# Altium PCB PCB_LSH-100.PcbDoc
Units mil, origin at the board's own origin, x right, y up, seen from the top; angles counter-clockwise.
Board outline 1950 x 3050 mil, 2 copper layers (Top Layer, Bottom Layer), stack 62.8 mil thick; 1 components, 35 nets, 548 pads, 0 vias.
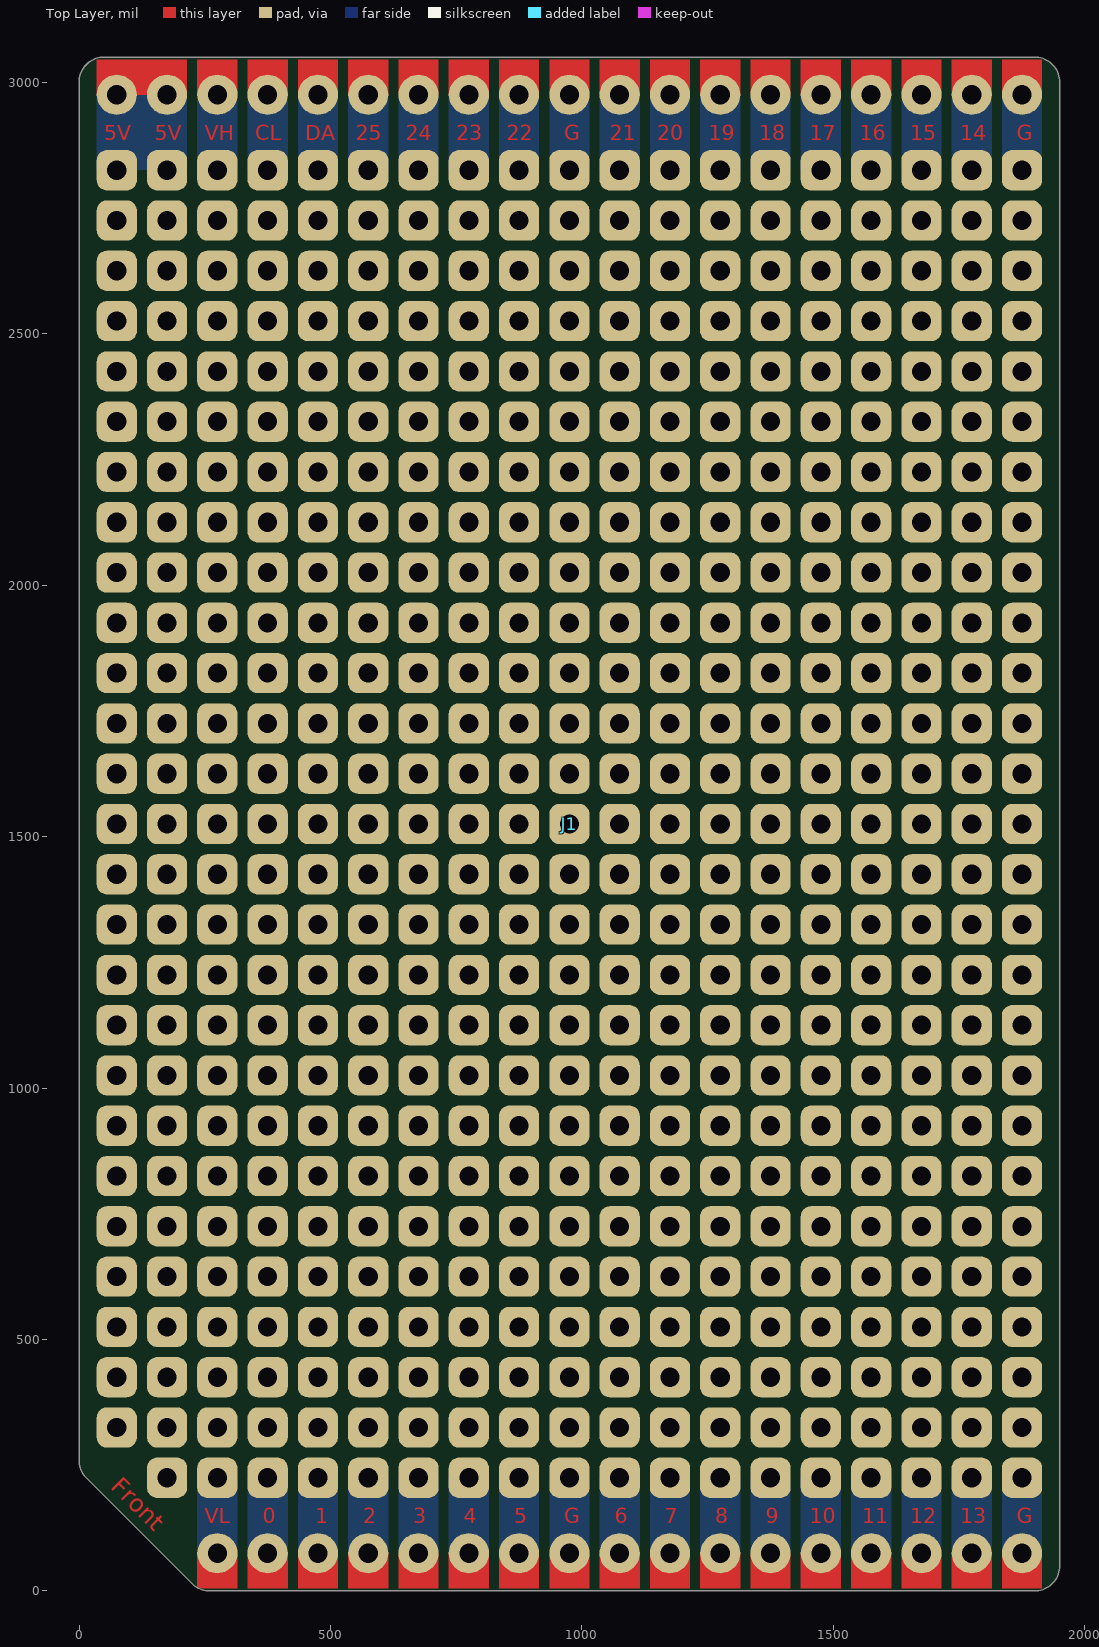
[diagram p0: Top Layer view]
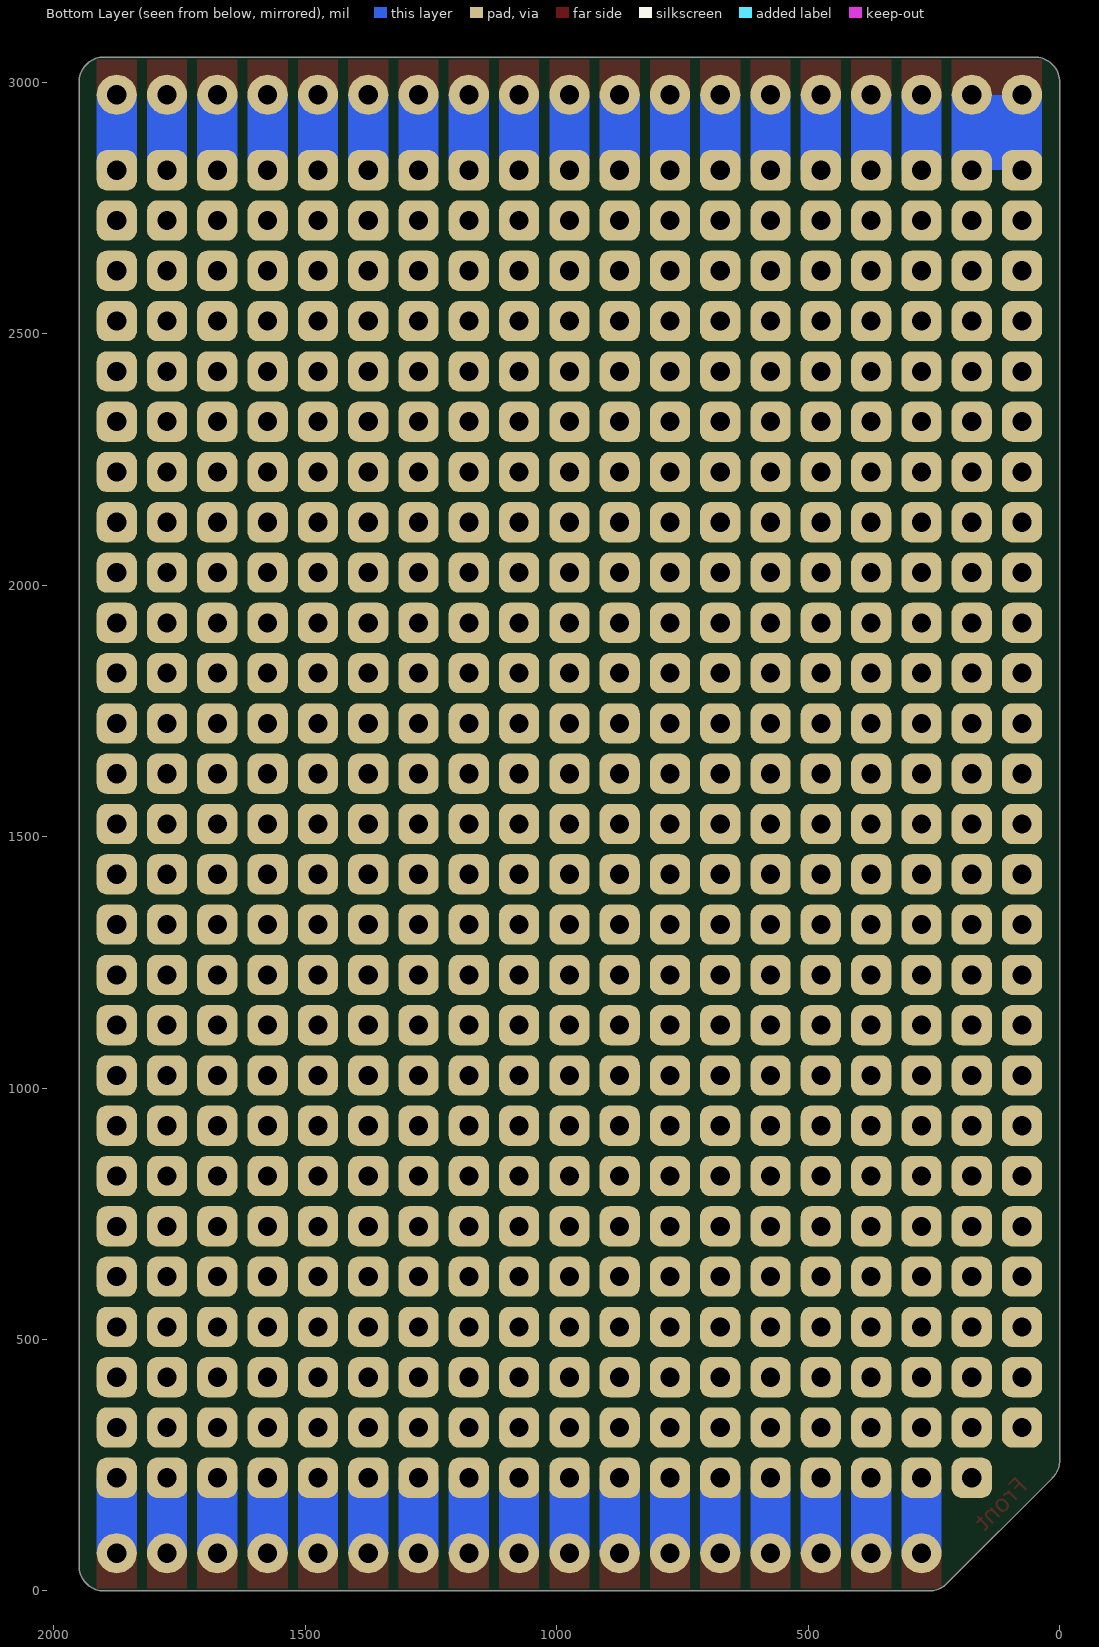
[diagram p1: Bottom Layer view, seen from below]

## Layer stack, top to bottom
Top Layer: signal copper 1.4
Dielectric: core 60, FR-4 S1170, Dk 4.8
Bottom Layer: signal copper 1.4

## Board outline
14.64,224.64 cw(c50,260) 0,260 0,3000 cw(c50,3000) 50,3050 1900,3050 cw(c1900,3000) 1950,3000 1950,50 cw(c1900,50) 1900,0 260,0 cw(c260,50) 224.64,14.64

## Design rules (kind name [scope] priority, off if disabled: settings)
Clearance KeepOut_Type [All vs (OnLayer('Keep-Out Layer'))] p1: gap=4
Clearance All_Type [All] p2: gap=10
ComponentClearance [All] p1 off: gap=10 collisioncheckmode=3 verticalgap=10 showdistances=FALSE
FabricationTestPointUsage TestPointUsage [All] p1: valid=0 allowmultiple=FALSE
FabricationTestpoint Testpoint [(IsPad And (OnTopLayer Or OnBottomLayer))] p1: side=3 testpointundercomponent=TRUE minsize=40 maxsize=100 preferedsize=60 minholesize=20 maxholesize=40 preferedholesize=32 testpointgrid=1 allowsidetop=TRUE allowsidebottom=TRUE usegrid=TRUE gridtolerance=0.01
Height [All] p1 off: minheight=0 maxheight=1000 prefheight=500
HoleSize [All] p1: absolutevalues=TRUE maxlimit=300 minlimit=8 maxpercent=80.000 minpercent=20.000
HoleToHoleClearance [All] p1: gap=12 allowstackedmicrovias=TRUE
MinimumSolderMaskSliver MinimumSolderMaskSliver_Logo [(HasFootprint('LOGO_METEROI_ST_12X3')) vs (HasFootprint('LOGO_METEROI_ST_12X3'))] p1: minsoldermaskwidth=0
MinimumSolderMaskSliver [All] p2: minsoldermaskwidth=5
PasteMaskExpansion [All] p1: expansion=1
PlaneClearance [All] p1: clearance=10
PlaneConnect [All] p1: planeconnectstyle=Direct reliefexpansion=6 reliefentries=4 reliefconductorwidth=6 reliefairgap=6
PolygonConnect PolygonConnect_PAD [All vs (ObjectKind = 'Pad')] p1: connectstyle=Relief reliefconductorwidth=10 reliefentries=4 polygonreliefangle="90 Angle"
PolygonConnect [All] p2: connectstyle=Direct reliefconductorwidth=6 reliefentries=4 polygonreliefangle="90 Angle"
RoomDefinition 01_LSH-100 [InComponentClass('01_LSH-100')] p1: confinementstyle=ConfineIn formatcopy=TRUE lockcomponents=FALSE outline -6150,-3500 -4150,-3500 -4150,-2500 -6150,-2500
RoutingVias [All] p1: holewidth=12 width=20 viastyle="Through Hole" minholewidth=12 minwidth=20 maxholewidth=280 maxwidth=500
SilkToSilkClearance [All] p1: silktosilkclearance=0
SilkscreenOverComponentPads [All] p1: minsilkscreentomaskgap=0
SolderMaskExpansion [All] p1: expansion=2
ViasUnderSMD [All] p1: allowed=TRUE
Width Width_Logo [(HasFootprint('LOGO_METEROI_ST_12X3'))] p1: maxlimit=100 minlimit=0.1 preferedwidth=10
Width [All] p2: maxlimit=200 minlimit=6 preferedwidth=6
16 further rules are at their usual default settings.

## Components (designator, comment, footprint, x,y, rotation, side; value= is the part's Value field where it differs from the comment)
J1 "LOP_SHIELD" LOP_SHIELD_MOD 0,0 r0 top locked

## Footprints (in the part's own frame and the unit in brackets; to place one, negate y for a bottom-side part, rotate by r counter-clockwise, add the part's x,y. Pads: shape width x height; smd on the part's side, far side on the other; paste and mask are expansions set on the pad)
LOP_SHIELD_MOD [mil]
  round 80 hole 38: 1(275,75) 2(375,75) 3(475,75) 4(575,75) 5(675,75) 6(775,75) 7(875,75) 8(975,75) 9(1075,75) 10(1175,75) 11(1275,75) 12(1375,75) 13(1475,75) 14(1575,75) 15(1675,75) 16(1775,75) 17(1875,75) 18(1875,2975) 19(1775,2975) 20(1675,2975) 21(1575,2975) 22(1475,2975) 23(1375,2975) 24(1275,2975) 25(1175,2975) 26(1075,2975) 27(975,2975) 28(875,2975) 29(775,2975) 30(675,2975) 31(575,2975) 32(475,2975) 33(375,2975) 34(275,2975) 35(175,2975) 36(75,2975)
  body extent 25,25 1925,3025, height 39

## Part data
J1: library part LOP_SHIELD_MOD, "Lophilo Shield Module Slot"

## Free pads (board coordinates)
  rrect50% 80x80 hole 38: 0(75,325) 0(75,425) 0(75,525) 0(75,625) 0(75,725) 0(75,825) 0(75,925) 0(75,1025) 0(75,1125) 0(75,1225) 0(75,1325) 0(75,1425) 0(75,1525) 0(75,1625) 0(75,1725) 0(75,1825) 0(75,1925) 0(75,2025) 0(75,2125) 0(75,2225) 0(75,2325) 0(75,2425) 0(75,2525) 0(75,2625) 0(75,2725) 0(75,2825) 0(175,225) 0(175,325) 0(175,425) 0(175,525) 0(175,625) 0(175,725) 0(175,825) 0(175,925) 0(175,1025) 0(175,1125) 0(175,1225) 0(175,1325) 0(175,1425) 0(175,1525) 0(175,1625) 0(175,1725) 0(175,1825) 0(175,1925) 0(175,2025) 0(175,2125) 0(175,2225) 0(175,2325) 0(175,2425) 0(175,2525) 0(175,2625) 0(175,2725) 0(175,2825) 0(275,225) 0(275,325) 0(275,425) 0(275,525) 0(275,625) 0(275,725) 0(275,825) 0(275,925) 0(275,1025) 0(275,1125) 0(275,1225) 0(275,1325) 0(275,1425) 0(275,1525) 0(275,1625) 0(275,1725) 0(275,1825) 0(275,1925) 0(275,2025) 0(275,2125) 0(275,2225) 0(275,2325) 0(275,2425) 0(275,2525) 0(275,2625) 0(275,2725) 0(275,2825) 0(375,225) 0(375,325) 0(375,425) 0(375,525) 0(375,625) 0(375,725) 0(375,825) 0(375,925) 0(375,1025) 0(375,1125) 0(375,1225) 0(375,1325) 0(375,1425) 0(375,1525) 0(375,1625) 0(375,1725) 0(375,1825) 0(375,1925) 0(375,2025) 0(375,2125) 0(375,2225) 0(375,2325) 0(375,2425) 0(375,2525) 0(375,2625) 0(375,2725) 0(375,2825) 0(475,225) 0(475,325) 0(475,425) 0(475,525) 0(475,625) 0(475,725) 0(475,825) 0(475,925) 0(475,1025) 0(475,1125) 0(475,1225) 0(475,1325) 0(475,1425) 0(475,1525) 0(475,1625) 0(475,1725) 0(475,1825) 0(475,1925) 0(475,2025) 0(475,2125) 0(475,2225) 0(475,2325) 0(475,2425) 0(475,2525) 0(475,2625) 0(475,2725) 0(475,2825) 0(575,225) 0(575,325) 0(575,425) 0(575,525) 0(575,625) 0(575,725) 0(575,825) 0(575,925) 0(575,1025) 0(575,1125) 0(575,1225) 0(575,1325) 0(575,1425) 0(575,1525) 0(575,1625) 0(575,1725) 0(575,1825) 0(575,1925) 0(575,2025) 0(575,2125) 0(575,2225) 0(575,2325) 0(575,2425) 0(575,2525) 0(575,2625) 0(575,2725) 0(575,2825) 0(675,225) 0(675,325) 0(675,425) 0(675,525) 0(675,625) 0(675,725) 0(675,825) 0(675,925) 0(675,1025) 0(675,1125) 0(675,1225) 0(675,1325) 0(675,1425) 0(675,1525) 0(675,1625) 0(675,1725) 0(675,1825) 0(675,1925) 0(675,2025) 0(675,2125) 0(675,2225) 0(675,2325) 0(675,2425) 0(675,2525) 0(675,2625) 0(675,2725) 0(675,2825) 0(775,225) 0(775,325) 0(775,425) 0(775,525) 0(775,625) 0(775,725) 0(775,825) 0(775,925) 0(775,1025) 0(775,1125) 0(775,1225) 0(775,1325) 0(775,1425) 0(775,1525) 0(775,1625) 0(775,1725) 0(775,1825) 0(775,1925) 0(775,2025) 0(775,2125) 0(775,2225) 0(775,2325) 0(775,2425) 0(775,2525) 0(775,2625) 0(775,2725) 0(775,2825) 0(875,225) 0(875,325) 0(875,425) 0(875,525) 0(875,625) 0(875,725) 0(875,825) 0(875,925) 0(875,1025) 0(875,1125) 0(875,1225) 0(875,1325) 0(875,1425) 0(875,1525) 0(875,1625) 0(875,1725) 0(875,1825) 0(875,1925) 0(875,2025) 0(875,2125) 0(875,2225) 0(875,2325) 0(875,2425) 0(875,2525) 0(875,2625) 0(875,2725) 0(875,2825) 0(975,225) 0(975,325) 0(975,425) 0(975,525) 0(975,625) 0(975,725) 0(975,825) 0(975,925) 0(975,1025) 0(975,1125) 0(975,1225) 0(975,1325) 0(975,1425) 0(975,1525) 0(975,1625) 0(975,1725) 0(975,1825) 0(975,1925) 0(975,2025) 0(975,2125) 0(975,2225) 0(975,2325) 0(975,2425) 0(975,2525) 0(975,2625) 0(975,2725) 0(975,2825) 0(1075,225) 0(1075,325) 0(1075,425) 0(1075,525) 0(1075,625) 0(1075,725) 0(1075,825) 0(1075,925) 0(1075,1025) 0(1075,1125) 0(1075,1225) 0(1075,1325) 0(1075,1425) 0(1075,1525) 0(1075,1625) 0(1075,1725) 0(1075,1825) 0(1075,1925) 0(1075,2025) 0(1075,2125) 0(1075,2225) 0(1075,2325) 0(1075,2425) 0(1075,2525) 0(1075,2625) 0(1075,2725) 0(1075,2825) 0(1175,225) 0(1175,325) 0(1175,425) 0(1175,525) 0(1175,625) 0(1175,725) 0(1175,825) 0(1175,925) 0(1175,1025) 0(1175,1125) 0(1175,1225) 0(1175,1325) 0(1175,1425) 0(1175,1525) 0(1175,1625) 0(1175,1725) 0(1175,1825) 0(1175,1925) 0(1175,2025) 0(1175,2125) 0(1175,2225) 0(1175,2325) 0(1175,2425) 0(1175,2525) 0(1175,2625) 0(1175,2725) 0(1175,2825) 0(1275,225) 0(1275,325) 0(1275,425) 0(1275,525) 0(1275,625) 0(1275,725) 0(1275,825) 0(1275,925) 0(1275,1025) 0(1275,1125) 0(1275,1225) 0(1275,1325) 0(1275,1425) 0(1275,1525) 0(1275,1625) 0(1275,1725) 0(1275,1825) 0(1275,1925) 0(1275,2025) 0(1275,2125) 0(1275,2225) 0(1275,2325) 0(1275,2425) 0(1275,2525) 0(1275,2625) 0(1275,2725) 0(1275,2825) 0(1375,225) 0(1375,325) 0(1375,425) 0(1375,525) 0(1375,625) 0(1375,725) 0(1375,825) 0(1375,925) 0(1375,1025) 0(1375,1125) 0(1375,1225) 0(1375,1325) 0(1375,1425) 0(1375,1525) 0(1375,1625) 0(1375,1725) 0(1375,1825) 0(1375,1925) 0(1375,2025) 0(1375,2125) 0(1375,2225) 0(1375,2325) 0(1375,2425) 0(1375,2525) 0(1375,2625) 0(1375,2725) 0(1375,2825) 0(1475,225) 0(1475,325) 0(1475,425) 0(1475,525) 0(1475,625) 0(1475,725) 0(1475,825) 0(1475,925) 0(1475,1025) 0(1475,1125) 0(1475,1225) 0(1475,1325) 0(1475,1425) 0(1475,1525) 0(1475,1625) 0(1475,1725) 0(1475,1825) 0(1475,1925) 0(1475,2025) 0(1475,2125) 0(1475,2225) 0(1475,2325) 0(1475,2425) 0(1475,2525) 0(1475,2625) 0(1475,2725) 0(1475,2825) 0(1575,225) 0(1575,325) 0(1575,425) 0(1575,525) 0(1575,625) 0(1575,725) 0(1575,825) 0(1575,925) 0(1575,1025) 0(1575,1125) 0(1575,1225) 0(1575,1325) 0(1575,1425) 0(1575,1525) 0(1575,1625) 0(1575,1725) 0(1575,1825) 0(1575,1925) 0(1575,2025) 0(1575,2125) 0(1575,2225) 0(1575,2325) 0(1575,2425) 0(1575,2525) 0(1575,2625) 0(1575,2725) 0(1575,2825) 0(1675,225) 0(1675,325) 0(1675,425) 0(1675,525) 0(1675,625) 0(1675,725) 0(1675,825) 0(1675,925) 0(1675,1025) 0(1675,1125) 0(1675,1225) 0(1675,1325) 0(1675,1425) 0(1675,1525) 0(1675,1625) 0(1675,1725) 0(1675,1825) 0(1675,1925) 0(1675,2025) 0(1675,2125) 0(1675,2225) 0(1675,2325) 0(1675,2425) 0(1675,2525) 0(1675,2625) 0(1675,2725) 0(1675,2825) 0(1775,225) 0(1775,325) 0(1775,425) 0(1775,525) 0(1775,625) 0(1775,725) 0(1775,825) 0(1775,925) 0(1775,1025) 0(1775,1125) 0(1775,1225) 0(1775,1325) 0(1775,1425) 0(1775,1525) 0(1775,1625) 0(1775,1725) 0(1775,1825) 0(1775,1925) 0(1775,2025) 0(1775,2125) 0(1775,2225) 0(1775,2325) 0(1775,2425) 0(1775,2525) 0(1775,2625) 0(1775,2725) 0(1775,2825) 0(1875,225) 0(1875,325) 0(1875,425) 0(1875,525) 0(1875,625) 0(1875,725) 0(1875,825) 0(1875,925) 0(1875,1025) 0(1875,1125) 0(1875,1225) 0(1875,1325) 0(1875,1425) 0(1875,1525) 0(1875,1625) 0(1875,1725) 0(1875,1825) 0(1875,1925) 0(1875,2025) 0(1875,2125) 0(1875,2225) 0(1875,2325) 0(1875,2425) 0(1875,2525) 0(1875,2625) 0(1875,2725) 0(1875,2825)

## Nets (pads, with @x,y where several pads share a name; then routed paths per layer and width w, separated by ;. In a path a pad name is that pad's centre, name@x,y a point inside that pad or via, vN(x,y) a via of type N, cw(c..) or ccw(c..) an arc to the next point about the centre after c; other vN are vias at no path point)
G1: J1.8 pad.0@975,225
G2: J1.17 pad.0@1875,225
G3: J1.18 pad.0@1875,2825
G4: J1.27 pad.0@975,2825
IO0: J1.2 pad.0@375,225
IO1: J1.3 pad.0@475,225
IO2: J1.4 pad.0@575,225
IO3: J1.5 pad.0@675,225
IO4: J1.6 pad.0@775,225
IO5: J1.7 pad.0@875,225
IO6: J1.9 pad.0@1075,225
IO7: J1.10 pad.0@1175,225
IO8: J1.11 pad.0@1275,225
IO9: J1.12 pad.0@1375,225
IO10: J1.13 pad.0@1475,225
IO11: J1.14 pad.0@1575,225
IO12: J1.15 pad.0@1675,225
IO13: J1.16 pad.0@1775,225
IO14: J1.19 pad.0@1775,2825
IO15: J1.20 pad.0@1675,2825
IO16: J1.21 pad.0@1575,2825
IO17: J1.22 pad.0@1475,2825
IO18: J1.23 pad.0@1375,2825
IO19: J1.24 pad.0@1275,2825
IO20: J1.25 pad.0@1175,2825
IO21: J1.26 pad.0@1075,2825
IO22: J1.28 pad.0@875,2825
IO23: J1.29 pad.0@775,2825
IO24: J1.30 pad.0@675,2825
IO25: J1.31 pad.0@575,2825
SCL: J1.33 pad.0@375,2825
SDA: J1.32 pad.0@475,2825
VDD5V: J1.35 J1.36 pad.0@75,2825 pad.0@175,2825
VREFH: J1.34 pad.0@275,2825
VREFL: J1.1 pad.0@275,225

## Other copper
Top Layer:
  rectangle net VDD5V: 35,2975 215,3045
  rectangle net VREFH: 235,2975 315,3045
  rectangle net SCL: 335,2975 415,3045
  rectangle net SDA: 435,2975 515,3045
  rectangle net IO25: 535,2975 615,3045
  rectangle net IO24: 635,2975 715,3045
  rectangle net IO23: 735,2975 815,3045
  rectangle net IO22: 835,2975 915,3045
  rectangle net G4: 935,2975 1015,3045
  rectangle net IO21: 1035,2975 1115,3045
  rectangle net IO20: 1135,2975 1215,3045
  rectangle net IO19: 1235,2975 1315,3045
  rectangle net IO18: 1335,2975 1415,3045
  rectangle net IO17: 1435,2975 1515,3045
  rectangle net IO16: 1535,2975 1615,3045
  rectangle net IO15: 1635,2975 1715,3045
  rectangle net IO14: 1735,2975 1815,3045
  rectangle net G3: 1835,2975 1915,3045
  region net G2: 1915,75 1835,75 1835,5 1915,5
  region net IO13: 1815,75 1735,75 1735,5 1815,5
  region net IO12: 1715,75 1635,75 1635,5 1715,5
  region net IO11: 1615,75 1535,75 1535,5 1615,5
  region net IO10: 1515,75 1435,75 1435,5 1515,5
  region net IO9: 1415,75 1335,75 1335,5 1415,5
  region net IO8: 1315,75 1235,75 1235,5 1315,5
  region net IO7: 1215,75 1135,75 1135,5 1215,5
  region net IO6: 1115,75 1035,75 1035,5 1115,5
  region net G1: 1015,75 935,75 935,5 1015,5
  region net IO5: 915,75 835,75 835,5 915,5
  region net IO4: 815,75 735,75 735,5 815,5
  region net IO3: 715,75 635,75 635,5 715,5
  region net IO2: 615,75 535,75 535,5 615,5
  region net IO1: 515,75 435,75 435,5 515,5
  region net IO0: 415,75 335,75 335,5 415,5
  region net VREFL: 315,75 235,75 235,5 315,5
  text "5V" at 50,2885 h30
  text "5V" at 150,2885 h30
  text "VH" at 250,2885 h30
  text "CL" at 350,2885 h30
  text "DA" at 450,2885 h30
  text "25" at 550,2885 h30
  text "24" at 650,2885 h30
  text "23" at 750,2885 h30
  text "22" at 850,2885 h30
  text "G" at 965,2885 h30
  text "21" at 1055,2885 h30
  text "20" at 1150,2885 h30
  text "19" at 1252.5,2885 h30
  text "18" at 1352.5,2885 h30
  text "17" at 1452.5,2885 h30
  text "16" at 1552.5,2885 h30
  text "15" at 1652.5,2885 h30
  text "14" at 1752.5,2885 h30
  text "G" at 1865,2885 h30
  text "Front" at 60.9,205 h35 r315
  text "VL" at 250,135 h30
  text "0" at 365,135 h30
  text "1" at 470,135 h30
  text "2" at 565,135 h30
  text "3" at 665,135 h30
  text "4" at 765,135 h30
  text "5" at 865,135 h30
  text "G" at 965,135 h30
  text "6" at 1065,135 h30
  text "7" at 1165,135 h30
  text "8" at 1265,135 h30
  text "9" at 1365,135 h30
  text "10" at 1452.5,135 h30
  text "11" at 1557.5,135 h30
  text "12" at 1652.5,135 h30
  text "13" at 1752.5,135 h30
  text "G" at 1865,135 h30
Bottom Layer:
  rectangle net VDD5V: 35,2825 215,2975
  rectangle net VREFH: 235,2825 315,2975
  rectangle net SCL: 335,2825 415,2975
  rectangle net SDA: 435,2825 515,2975
  rectangle net IO25: 535,2825 615,2975
  rectangle net IO24: 635,2825 715,2975
  rectangle net IO23: 735,2825 815,2975
  rectangle net IO22: 835,2825 915,2975
  rectangle net G4: 935,2825 1015,2975
  rectangle net IO21: 1035,2825 1115,2975
  rectangle net IO20: 1135,2825 1215,2975
  rectangle net IO19: 1235,2825 1315,2975
  rectangle net IO18: 1335,2825 1415,2975
  rectangle net IO17: 1435,2825 1515,2975
  rectangle net IO16: 1535,2825 1615,2975
  rectangle net IO15: 1635,2825 1715,2975
  rectangle net IO14: 1735,2825 1815,2975
  rectangle net G3: 1835,2825 1915,2975
  region net G2: 1915,225 1835,225 1835,75 1915,75
  region net IO13: 1815,225 1735,225 1735,75 1815,75
  region net IO12: 1715,225 1635,225 1635,75 1715,75
  region net IO11: 1615,225 1535,225 1535,75 1615,75
  region net IO10: 1515,225 1435,225 1435,75 1515,75
  region net IO9: 1415,225 1335,225 1335,75 1415,75
  region net IO8: 1315,225 1235,225 1235,75 1315,75
  region net IO7: 1215,225 1135,225 1135,75 1215,75
  region net IO6: 1115,225 1035,225 1035,75 1115,75
  region net G1: 1015,225 935,225 935,75 1015,75
  region net IO5: 915,225 835,225 835,75 915,75
  region net IO4: 815,225 735,225 735,75 815,75
  region net IO3: 715,225 635,225 635,75 715,75
  region net IO2: 615,225 535,225 535,75 615,75
  region net IO1: 515,225 435,225 435,75 515,75
  region net IO0: 415,225 335,225 335,75 415,75
  region net VREFL: 315,225 235,225 235,75 315,75

## Silkscreen, mask and mechanical layers (free items; w line width, h text height)
Top Solder:
  rectangle: 31,2975 219,3055
  rectangle: 231,2975 319,3055
  rectangle: 331,2975 419,3055
  rectangle: 431,2975 519,3055
  rectangle: 531,2975 619,3055
  rectangle: 631,2975 719,3055
  rectangle: 731,2975 819,3055
  rectangle: 831,2975 919,3055
  rectangle: 931,2975 1019,3055
  rectangle: 1031,2975 1119,3055
  rectangle: 1131,2975 1219,3055
  rectangle: 1231,2975 1319,3055
  rectangle: 1331,2975 1419,3055
  rectangle: 1431,2975 1519,3055
  rectangle: 1531,2975 1619,3055
  rectangle: 1631,2975 1719,3055
  rectangle: 1731,2975 1819,3055
  rectangle: 1831,2975 1919,3055
  region: 1919,75 1831,75 1831,-5 1919,-5
  region: 1819,75 1731,75 1731,-5 1819,-5
  region: 1719,75 1631,75 1631,-5 1719,-5
  region: 1619,75 1531,75 1531,-5 1619,-5
  region: 1519,75 1431,75 1431,-5 1519,-5
  region: 1419,75 1331,75 1331,-5 1419,-5
  region: 1319,75 1231,75 1231,-5 1319,-5
  region: 1219,75 1131,75 1131,-5 1219,-5
  region: 1119,75 1031,75 1031,-5 1119,-5
  region: 1019,75 931,75 931,-5 1019,-5
  region: 919,75 831,75 831,-5 919,-5
  region: 819,75 731,75 731,-5 819,-5
  region: 719,75 631,75 631,-5 719,-5
  region: 619,75 531,75 531,-5 619,-5
  region: 519,75 431,75 431,-5 519,-5
  region: 419,75 331,75 331,-5 419,-5
  region: 319,75 231,75 231,-5 319,-5
  text "5V" at 50,2885 h30
  text "5V" at 150,2885 h30
  text "VH" at 250,2885 h30
  text "CL" at 350,2885 h30
  text "DA" at 450,2885 h30
  text "25" at 550,2885 h30
  text "24" at 650,2885 h30
  text "23" at 750,2885 h30
  text "22" at 850,2885 h30
  text "G" at 965,2885 h30
  text "21" at 1055,2885 h30
  text "20" at 1150,2885 h30
  text "19" at 1252.5,2885 h30
  text "18" at 1352.5,2885 h30
  text "17" at 1452.5,2885 h30
  text "16" at 1552.5,2885 h30
  text "15" at 1652.5,2885 h30
  text "14" at 1752.5,2885 h30
  text "G" at 1865,2885 h30
  text "Front" at 60.9,205 h35 r315
  text "VL" at 250,135 h30
  text "0" at 365,135 h30
  text "1" at 470,135 h30
  text "2" at 565,135 h30
  text "3" at 665,135 h30
  text "4" at 765,135 h30
  text "5" at 865,135 h30
  text "G" at 965,135 h30
  text "6" at 1065,135 h30
  text "7" at 1165,135 h30
  text "8" at 1265,135 h30
  text "9" at 1365,135 h30
  text "10" at 1452.5,135 h30
  text "11" at 1557.5,135 h30
  text "12" at 1652.5,135 h30
  text "13" at 1752.5,135 h30
  text "G" at 1865,135 h30
Bottom Solder:
  text "5V" at 100,2885 h30
  text "5V" at 200,2885 h30
  text "VH" at 300,2885 h30
  text "CL" at 400,2885 h30
  text "DA" at 500,2885 h30
  text "25" at 600,2885 h30
  text "24" at 700,2885 h30
  text "23" at 800,2885 h30
  text "22" at 900,2885 h30
  text "G" at 985,2885 h30
  text "21" at 1095,2885 h30
  text "20" at 1200,2885 h30
  text "19" at 1297.5,2885 h30
  text "18" at 1397.5,2885 h30
  text "17" at 1497.5,2885 h30
  text "16" at 1597.5,2885 h30
  text "15" at 1697.5,2885 h30
  text "14" at 1797.5,2885 h30
  text "G" at 1885,2885 h30
  text "VL" at 300,135 h30
  text "0" at 385,135 h30
  text "1" at 480,135 h30
  text "2" at 585,135 h30
  text "3" at 685,135 h30
  text "4" at 785,135 h30
  text "5" at 885,135 h30
  text "G" at 985,135 h30
  text "6" at 1085,135 h30
  text "7" at 1185,135 h30
  text "8" at 1285,135 h30
  text "9" at 1385,135 h30
  text "10" at 1497.5,135 h30
  text "11" at 1592.5,135 h30
  text "12" at 1697.5,135 h30
  text "13" at 1797.5,135 h30
  text "G" at 1885,135 h30
Mechanical 1:
  the board outline again, w5
Mechanical 32:
  drawing of 1984 lines, arcs and shapes, not listed
  text "1" at -2670,4125 h50
  text "2" at -1670,4125 h50
  text "3" at -670,4125 h50
  text "4" at 330,4125 h50
  text "5" at 1330,4125 h50
  text "6" at 2330,4125 h50
  text "7" at 3330,4125 h50
  text "8" at 4330,4125 h50
  text "F" at -3215,3950 h50
  text "F" at 4885,3950 h50
  text "PCB.Service@meteroi.com" at 4640,3010 h100 r90
  text "208 One Meteroi Dr." at 4730,3010 h100 r90
  text "Shanghai 200233, China" at 4820,3010 h100 r90
  text "E" at -3215,2950 h50
  text "E" at 4885,2950 h50
  text "D" at -3215,1950 h50
  text "D" at 4885,1950 h50
  text "C" at -3215,950 h50
  text "C" at 4885,950 h50
  text "B" at -3215,-50 h50
  text "B" at 4885,-50 h50
  text "xxxxxxxxx@meteroi.com" at 4660,-460 h120 r90
  text "xxxxxxxxx@meteroi.com" at 4810,-460 h120 r90
  text "A" at -3215,-1050 h50
  text "A" at 4885,-1050 h50
  text "Your Name" at 4660,-1070 h120 r90
  text "Your Name" at 4810,-1070 h120 r90
  text "Title:" at -3110,-1280 h80
  text "Sheet:" at -10,-1280 h80
  text "Size:" at 590,-1280 h80
  text "Layer:" at 890,-1280 h80
  text "Rev:" at 1740,-1280 h80
  text "D/N:" at 2040,-1280 h80
  text "P/N:" at 2890,-1280 h80
  text "S/N:" at 3590,-1280 h80
  text "0" at 1900,-1310 h120
  text "420-XXXDDD" at 2220,-1310 h120
  text "XXX-DDD" at 3070,-1310 h120
  text "HDNYYMMDDNN" at 3770,-1310 h120
  text "The Title of the Document" at -2900,-1330 h150
  text "Project:" at -3110,-1430 h80
  text "Size:" at -1000,-1430 h80
  text "Date:" at 1740,-1430 h80
  text "Template Ver:" at 2590,-1430 h80
  text "Unit:" at 3240,-1430 h80
  text "Scale:" at 3690,-1430 h80
  text "The Project's Name" at -2850,-1450 h100
  text "00.0 mm X 00.0 mm" at -830,-1450 h100
  text "of" at 220,-1450 h80
  text "00" at 10,-1460 h200
  text "00" at 310,-1460 h200
  text "B" at 680,-1460 h250
  text "CONFIDENTIAL" at 890,-1460 h120
  text "05-01-2011" at 1940,-1460 h120
  text "1.0" at 3050,-1460 h100
  text "Inch" at 3430,-1460 h100
  text "DO NOT SCALE" at 3920,-1460 h100
  text "Designer:" at 4630,-1460 h80 r90
  text "Engineering:" at 4780,-1460 h80 r90
  text "1" at -2670,-1575 h50
  text "2" at -1670,-1575 h50
  text "3" at -670,-1575 h50
  text "4" at 330,-1575 h50
  text "5" at 1330,-1575 h50
  text "6" at 2330,-1575 h50
  text "7" at 3330,-1575 h50
  text "8" at 4330,-1575 h50